# EAGLE board tinynumitronboard (EAGLE 6.3)
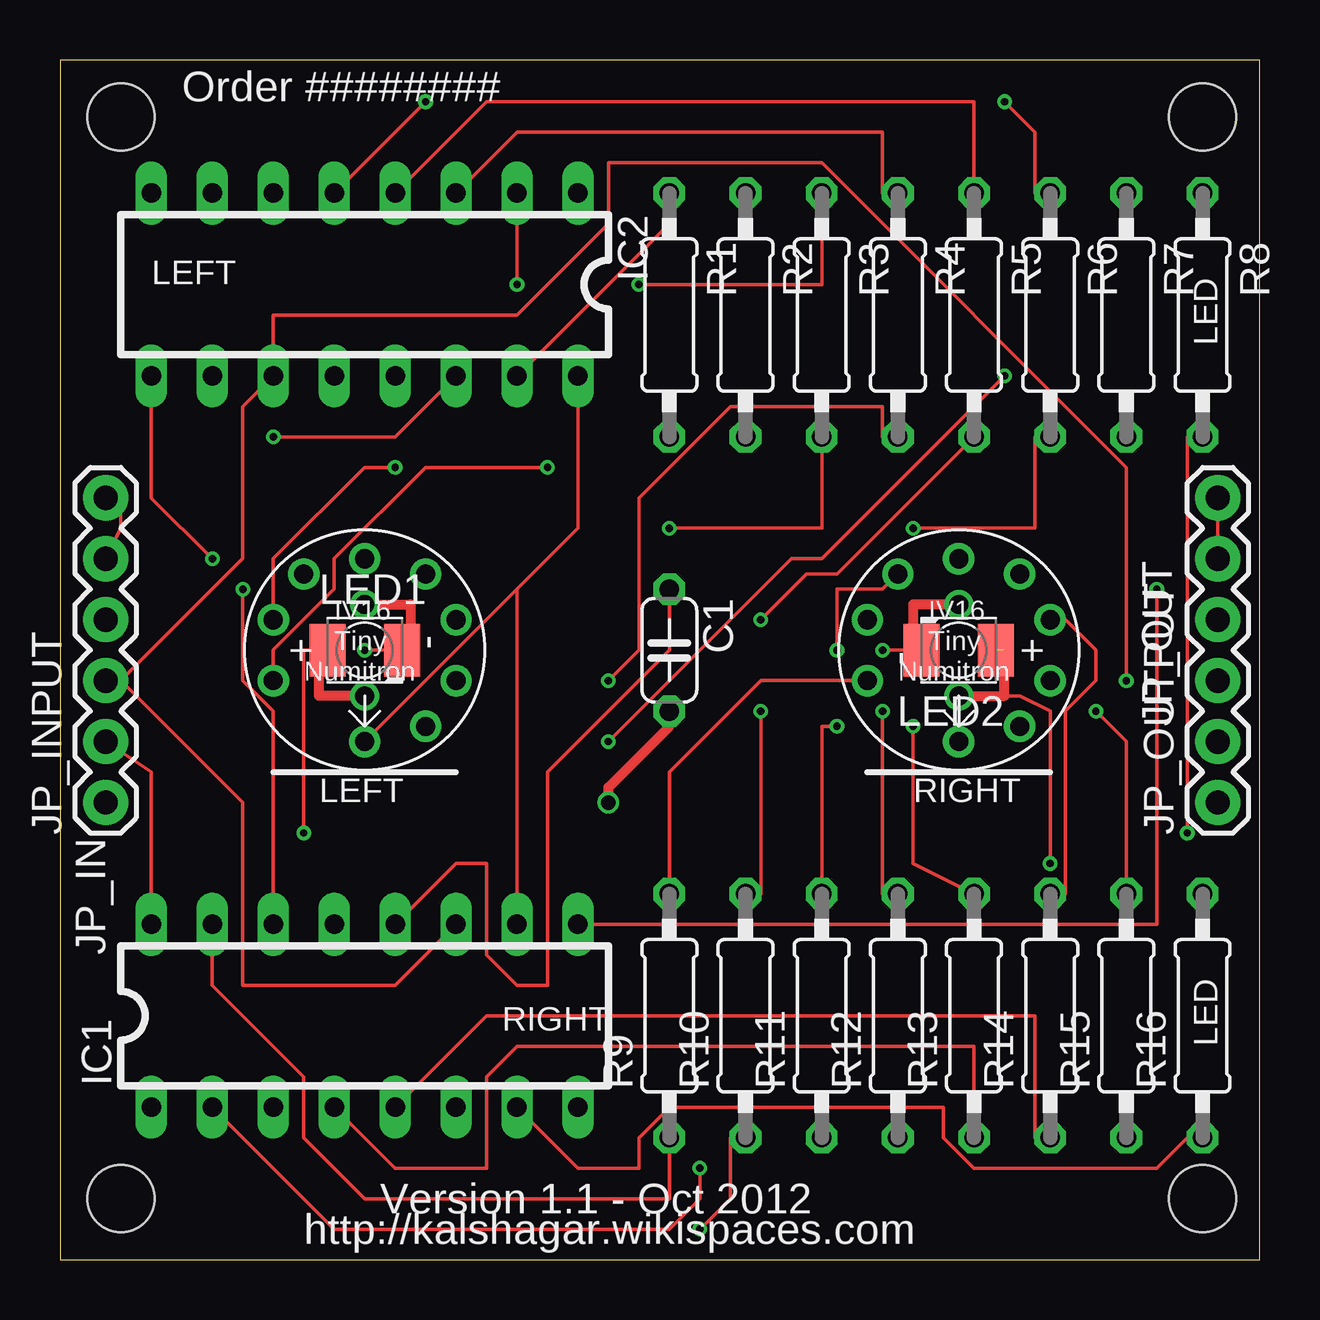
[diagram p0: board, top side]
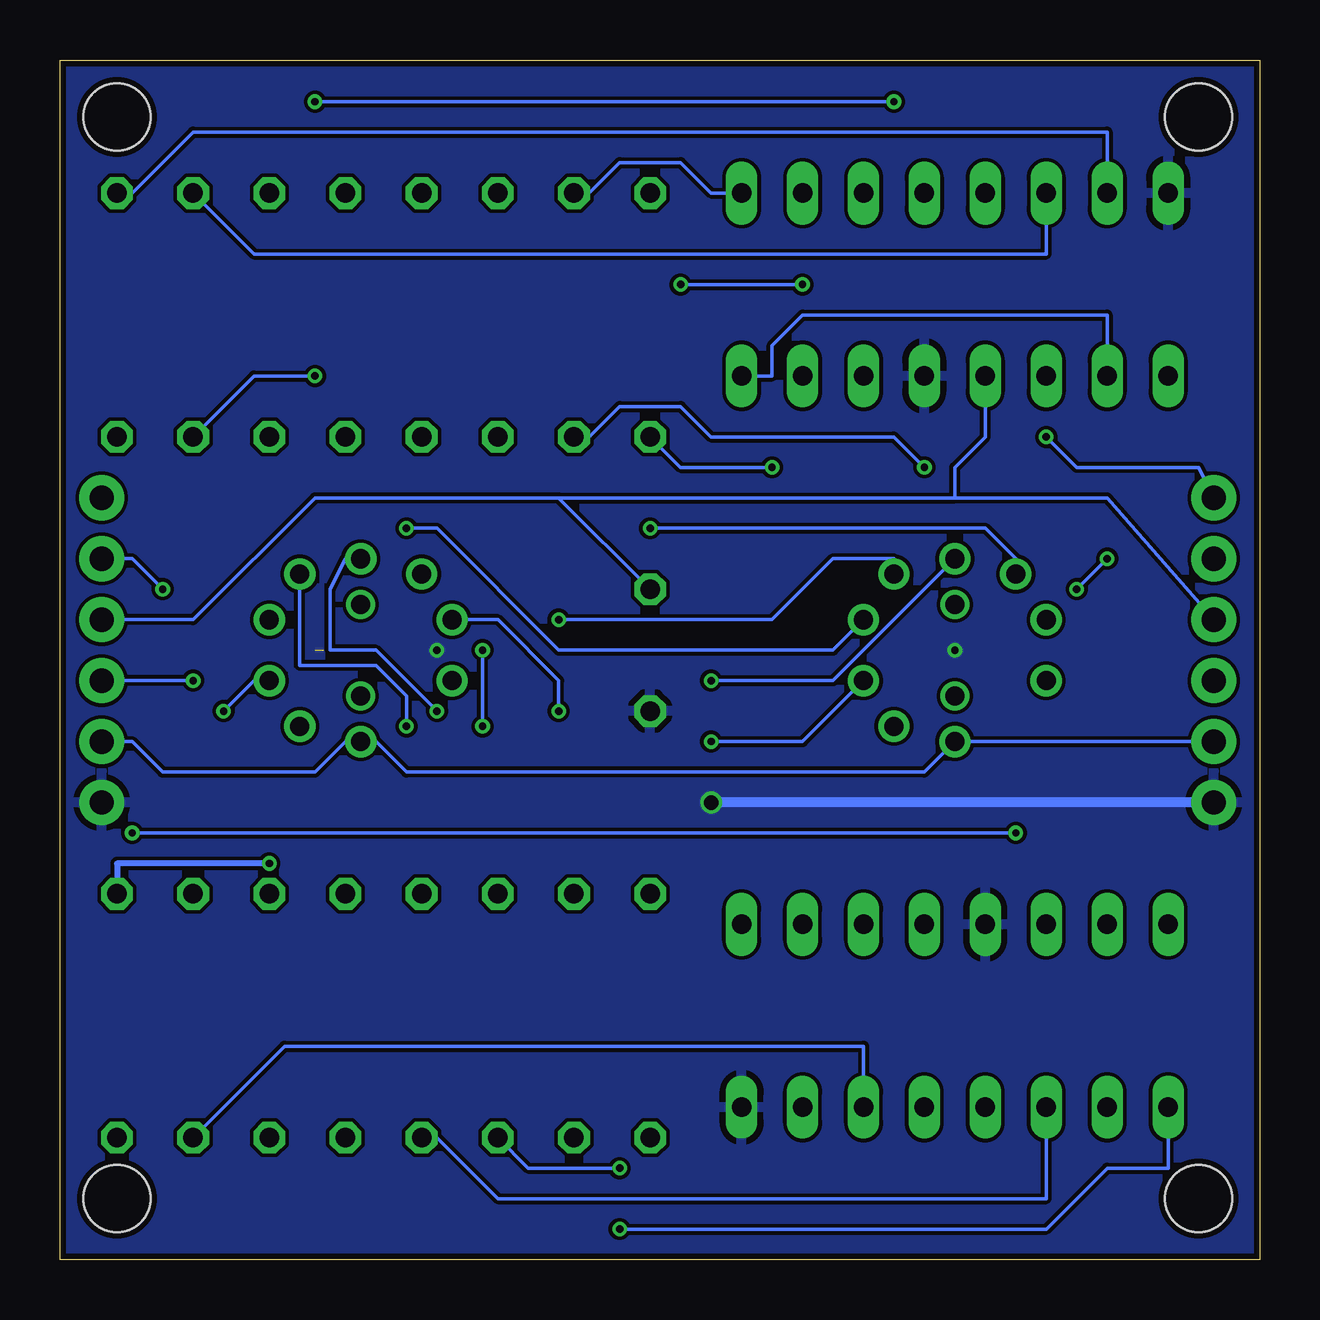
[diagram p1: board, bottom side, seen from below]

Size 50 x 50 mm. Coordinates in mm from the lower left corner, seen from the top.
Outline: 0,0 50,0 50,50 0,50 0,0
Copper layers (1*16): Top 0.035mm / dielectric 1.5mm / Bottom 0.035mm
Design rules "default": minimum track width 6mil, minimum drill 12mil, track to track 6mil, track to pad 6mil, pad to pad 6mil, via to via 6mil, smd to smd 0mil, copper to edge 10mil, drill to drill 10mil, minimum pad ring 10mil, minimum via ring 6mil, stop-mask expansion 2mil, vias tented up to drill 100mil, thermal gap 10mil
Holes 2.8 mm at 2.54,2.54 47.62,2.54 2.54,47.62 47.62,47.62

## Footprints (pad centres in the part's own frame; a part is rotated, then mirrored left to right if it is on the bottom)
C050-024X044 = drill 0.813 octagon: 1 -2.54,0; 2 2.54,0
DIL16 = drill 0.813 long: 1 -8.89,-3.81; 2 -6.35,-3.81; 3 -3.81,-3.81; 4 -1.27,-3.81; 5 1.27,-3.81; 6 3.81,-3.81; 7 6.35,-3.81; 8 8.89,-3.81; 9 8.89,3.81; 10 6.35,3.81; 11 3.81,3.81; 12 1.27,3.81; 13 -1.27,3.81; 14 -3.81,3.81; 15 -6.35,3.81; 16 -8.89,3.81
1X06 = drill 1.016 pad 1.88: 1 0,0; 2 2.54,0; 3 5.08,0; 4 7.62,0; 5 10.16,0; 6 12.7,0
KA-3528ASYC = smd 1.5 x 2.2: A -1.55,0; C 1.55,0
0207/10 = drill 0.813 octagon: 1 -5.08,0; 2 5.08,0
IV16TINY_NUMITRON_PAC = drill 0.8: NC 2.54,-3.175; PB -3.81,1.27; PBL -3.81,-1.27; PBR 3.81,1.27; PM -2.54,3.175; PT 2.54,3.175; PTL 0,3.81; PTR 3.81,-1.27; VCC 0,-3.81

## Placement (x,y rotation side)
C1  1uF  [C050-024X044]  25.4,25.4 270 top
IC1  74LS595N  [DIL16]  12.7,10.16 0 top
IC2  74LS595N  [DIL16]  12.7,40.64 180 top
JP_INPUT  [1X06]  1.91,19.05 90 top
JP_OUTPUT  [1X06]  48.26,19.05 90 top
LED1  [KA-3528ASYC]  12.7,25.4 0 top
LED2  [KA-3528ASYC]  37.47,25.4 180 top
R1  [0207/10]  25.4,39.37 270 top
R2  [0207/10]  28.57,39.37 270 top
R3  [0207/10]  31.75,39.37 270 top
R4  [0207/10]  34.92,39.37 270 top
R5  [0207/10]  38.1,39.37 270 top
R6  [0207/10]  41.27,39.37 270 top
R7  [0207/10]  44.45,39.37 270 top
R8  [0207/10]  47.62,39.37 270 top
R9  [0207/10]  25.4,10.16 90 top
R10  [0207/10]  28.57,10.16 90 top
R11  [0207/10]  31.75,10.16 90 top
R12  [0207/10]  34.92,10.16 90 top
R13  [0207/10]  38.1,10.16 90 top
R14  [0207/10]  41.27,10.16 90 top
R15  [0207/10]  44.45,10.16 90 top
R16  [0207/10]  47.62,10.16 90 top
U$1  IV16TINY_NUMITRON  [IV16TINY_NUMITRON_PAC]  12.7,25.4 0 top
U$2  IV16TINY_NUMITRON  [IV16TINY_NUMITRON_PAC]  37.47,25.4 0 top

## Library data of the parts
C1 R1-R16 = resistor
IC1 IC2 JP_INPUT JP_OUTPUT = SparkFun
LED1 LED2 = led
U$1 U$2 = kalshagar

## Nets
GND: C1.2 IC1.8 IC1.13 IC2.8 IC2.13 JP_INPUT.1 JP_OUTPUT.1 LED1.C LED2.C
N$1: R1.2 U$1.PBL
N$2: R2.2 U$1.PB
N$3: R3.2 U$1.PM
N$4: R4.2 U$1.PTL
N$5: R5.2 U$1.PT
N$6: R6.2 U$1.PBR
N$7: R7.2 U$1.PTR
N$8: IC2.15 R1.1
N$9: IC2.1 R2.1
N$10: IC2.2 R3.1
N$11: IC2.3 R4.1
N$12: IC2.4 R5.1
N$13: IC2.5 R6.1
N$14: IC2.6 R7.1
N$15: IC2.14 JP_INPUT.5 JP_INPUT.6
N$16: IC2.7 R8.1
N$17: LED1.A R8.2
N$18: C1.1 IC1.12 IC2.12 JP_INPUT.4 JP_OUTPUT.4
N$19: IC1.11 IC2.11 JP_INPUT.3 JP_OUTPUT.3
N$20: R9.2 U$2.PBL
N$21: R10.2 U$2.PB
N$22: IC1.9 JP_OUTPUT.5 JP_OUTPUT.6
N$24: R11.2 U$2.PM
N$25: R12.2 U$2.PTL
N$26: R13.2 U$2.PT
N$27: R14.2 U$2.PBR
N$28: R15.2 U$2.PTR
N$29: IC1.15 R9.1
N$30: IC1.1 R10.1
N$31: IC1.2 R11.1
N$32: IC1.3 R12.1
N$33: IC1.4 R13.1
N$34: IC1.5 R14.1
N$35: IC1.6 R15.1
N$36: IC1.7 R16.1
N$37: LED2.A R16.2
N$38: IC1.14 IC2.9
VCC: IC1.10 IC1.16 IC2.10 IC2.16 JP_INPUT.2 JP_OUTPUT.2 U$1.VCC U$2.VCC

## Tracks (layer width: path | path; a pad name or v marks a point on that pad's centre or on a via)
GND  (via drill 0.3, 0.6)
  Top 0.152: v12.7,25.4 LED1.C | v34.29,25.4 LED2.C
  Top 0.406: v22.86,19.05 22.86,19.68 25.4,22.23 C1.2
  Bottom 0.406: JP_INPUT.1 v22.86,19.05
  pour Bottom: -1.27,50.8 52.07,50.8 52.07,49.53 52.07,-1.27 -1.27,-1.27
N$1  (via drill 0.3)
  Top 0.152: U$1.PBL 8.89,25.4 11.43,27.94 11.43,29.21 15.24,33.02 v20.32,33.02
  Bottom 0.152: v20.32,33.02 24.13,33.02 R1.2
N$2  (via drill 0.3)
  Top 0.152: U$1.PB 8.89,29.21 12.7,33.02 v13.97,33.02
  Bottom 0.152: v13.97,33.02 15.24,34.29 22.86,34.29 24.13,35.56 26.67,35.56 27.94,34.29 R2.2
N$3  (via drill 0.3)
  Top 0.152: v25.4,30.48 31.75,30.48 R3.2
  Bottom 0.152: v25.4,30.48 11.43,30.48 10.16,29.21 U$1.PM
N$4  (via drill 0.3)
  Top 0.152: v22.86,24.13 24.13,25.4 24.13,31.75 27.94,35.56 34.29,35.56 34.29,34.29 R4.2
  Bottom 0.152: U$1.PTL 17.78,24.13 v22.86,24.13
N$5  (via drill 0.3)
  Top 0.152: v29.21,26.67 31.11,28.57 32.38,28.57 R5.2
  Bottom 0.152: v29.21,26.67 20.32,26.67 17.78,29.21 15.24,29.21 U$1.PT
N$6  (via drill 0.3)
  Top 0.152: v35.56,30.48 40.64,30.48 40.64,34.29 R6.2
  Bottom 0.152: U$1.PBR 17.78,25.4 29.21,25.4 34.29,30.48 v35.56,30.48
N$7  (via drill 0.3)
  Top 0.152: v22.86,21.59 30.48,29.21 31.75,29.21 v39.37,36.83
  Bottom 0.152: U$1.PTR 19.05,21.59 v22.86,21.59 | v39.37,36.83 41.91,36.83 R7.2
N$8
  Top 0.152: IC2.15 25.4,43.18 R1.1
N$9
  Bottom 0.152: IC2.1 22.86,44.45 24.13,45.72 26.67,45.72 27.94,44.45 R2.1
N$10  (via drill 0.3)
  Top 0.152: v19.05,40.64 IC2.2 | v24.13,40.64 31.75,40.64 R3.1
  Bottom 0.152: v24.13,40.64 v19.05,40.64
N$11
  Top 0.152: IC2.3 19.05,46.99 34.29,46.99 34.29,44.45 R4.1
N$12
  Top 0.152: IC2.4 17.78,48.26 38.1,48.26 R5.1
N$13  (via drill 0.3)
  Top 0.152: v15.24,48.26 IC2.5 | v39.37,48.26 40.64,46.99 40.64,44.45 R6.1
  Bottom 0.152: v39.37,48.26 v15.24,48.26
N$14
  Bottom 0.152: IC2.6 8.89,41.91 41.91,41.91 R7.1
N$15  (via drill 0.3)
  Top 0.152: IC2.14 13.97,34.29 v8.89,34.29 | JP_INPUT.5 2.54,30.48 2.54,31.75 JP_INPUT.6
  Bottom 0.152: v8.89,34.29 7.62,33.02 2.54,33.02 JP_INPUT.6
N$16
  Bottom 0.152: IC2.7 6.35,46.99 44.45,46.99 46.99,44.45 R8.1
N$17  (via drill 0.3)
  Top 0.152: v10.16,17.78 10.16,25.4 LED1.A 11.43,25.4 | v46.99,17.78 46.99,34.29 R8.2
  Bottom 0.152: v46.99,17.78 v10.16,17.78
N$18
  Top 0.152: IC1.12 16.51,16.51 17.78,16.51 17.78,12.7 19.05,11.43 20.32,11.43 20.32,20.32 25.4,25.4 C1.1
  Bottom 0.152: IC2.12 11.43,34.29 12.7,33.02 12.7,31.75 | 12.7,31.75 6.35,31.75 JP_INPUT.4 | JP_OUTPUT.4 44.45,26.67 39.37,31.75 29.21,31.75 | C1.1 29.21,31.75 | 29.21,31.75 12.7,31.75
N$19  (via drill 0.3)
  Top 0.152: IC1.11 13.97,11.43 7.62,11.43 7.62,19.05 2.54,24.13 | 2.54,24.13 7.62,29.21 7.62,35.56 IC2.11 8.89,39.37 19.05,39.37 22.86,43.18 22.86,45.72 31.75,45.72 44.45,33.02 v44.45,24.13 | 2.54,24.13 JP_INPUT.3
  Bottom 0.152: v44.45,24.13 JP_OUTPUT.3
N$20
  Top 0.152: U$2.PBL 29.21,24.13 25.4,20.32 R9.2
N$21  (via drill 0.3)
  Top 0.152: v29.21,22.86 29.21,15.24 R10.2
  Bottom 0.152: v29.21,22.86 29.21,24.13 31.75,26.67 U$2.PB
N$22  (via drill 0.3)
  Top 0.152: IC1.9 45.72,13.97 v45.72,27.94 | JP_OUTPUT.5 JP_OUTPUT.6
  Bottom 0.152: v45.72,27.94 46.99,29.21 JP_OUTPUT.5
N$24  (via drill 0.3)
  Top 0.152: R11.2 31.75,22.23 v32.38,22.23 | v32.38,25.4 32.38,27.94 34.29,27.94 U$2.PM
  Bottom 0.152: v32.38,22.23 v32.38,25.4
N$25  (via drill 0.3)
  Top 0.152: v34.29,22.86 34.29,15.24 R12.2
  Bottom 0.152: v34.29,22.86 36.83,25.4 38.73,25.4 38.73,27.94 38.1,29.21 U$2.PTL
N$26  (via drill 0.3)
  Top 0.152: R13.2 35.56,16.51 v35.56,22.23
  Bottom 0.152: v35.56,22.23 35.56,23.5 36.83,24.77 40.01,24.77 U$2.PT
N$27
  Top 0.152: U$2.PBR 41.91,26.67 43.18,25.4 43.18,24.13 41.91,22.86 41.91,15.24 R14.2
N$28  (via drill 0.3)
  Top 0.152: v43.18,22.86 44.45,21.59 R15.2
  Bottom 0.152: v43.18,22.86 41.91,24.13 U$2.PTR
N$29
  Top 0.152: IC1.15 6.35,11.43 10.16,7.62 10.16,5.08 12.7,2.54 25.4,2.54 R9.1
N$30  (via drill 0.3)
  Top 0.152: v26.67,1.27 27.94,2.54 27.94,5.08 R10.1
  Bottom 0.152: IC1.1 3.81,3.81 6.35,3.81 8.89,1.27 v26.67,1.27
N$31  (via drill 0.3)
  Top 0.152: IC1.2 11.43,1.27 25.4,1.27 26.67,2.54 v26.67,3.81
  Bottom 0.152: v26.67,3.81 30.48,3.81 R11.1
N$32
  Bottom 0.152: IC1.3 8.89,2.54 31.75,2.54 34.29,5.08 R12.1
N$33
  Top 0.152: IC1.4 13.97,3.81 17.78,3.81 17.78,7.62 19.05,8.89 38.1,8.89 R13.1
N$34
  Top 0.152: IC1.5 17.78,10.16 40.64,10.16 40.64,5.08 R14.1
N$35
  Bottom 0.152: IC1.6 16.51,8.89 40.64,8.89 R15.1
N$36
  Top 0.152: IC1.7 21.59,3.81 24.13,3.81 24.13,5.08 25.4,6.35 36.83,6.35 36.83,5.08 38.1,3.81 45.72,3.81 46.99,5.08 R16.1
N$37  (via drill 0.3, 0.8)  (1 unrouted)
  Top 0.152: v41.27,16.51 41.27,22.86 40.01,23.5 v37.47,23.5
  Top 0.406: v37.47,23.5 39.37,23.5 39.37,25.4
  Bottom 0.254: v41.27,16.51 47.62,16.51 R16.2
N$38  (via drill 0.3)
  Top 0.152: IC1.14 8.89,22.86 7.62,24.13 v7.62,27.94 | v6.35,29.21 3.81,31.75 IC2.9
  Bottom 0.152: v6.35,29.21 v7.62,27.94
S$1  (via drill 0.8)
  Top 0.406: v37.47,27.3 35.56,27.3 35.56,26.04
S$3  (via drill 0.8)
  Top 0.406: v12.7,27.3 14.61,27.3 14.61,26.04
S$4  (via drill 0.8)
  Top 0.406: v12.7,23.5 10.79,23.5 10.79,24.77
VCC
  Top 0.152: IC1.16 3.81,20.32 JP_INPUT.2 | 19.05,27.94 21.59,30.48 IC2.16 | 19.05,27.94 U$1.VCC | 19.05,27.94 IC1.10
  Bottom 0.152: JP_OUTPUT.2 46.99,21.59 45.72,20.32 39.37,20.32 38.1,21.59 U$2.VCC 36.83,21.59 35.56,20.32 13.97,20.32 U$1.VCC JP_INPUT.2 | IC2.10 6.35,39.37 19.05,39.37 20.32,38.1 20.32,36.83 IC2.16

## Text on the board
_tNames: Order ######## | LEFT | LED | - | + | - | + | JP_OUT | LEFT | RIGHT | JP_IN | RIGHT | LED | Version 1.1 - Oct 2012 | http://kalshagar.wikispaces.com